# EAGLE board Testing Station Draft V1 (EAGLE 9.4.2)
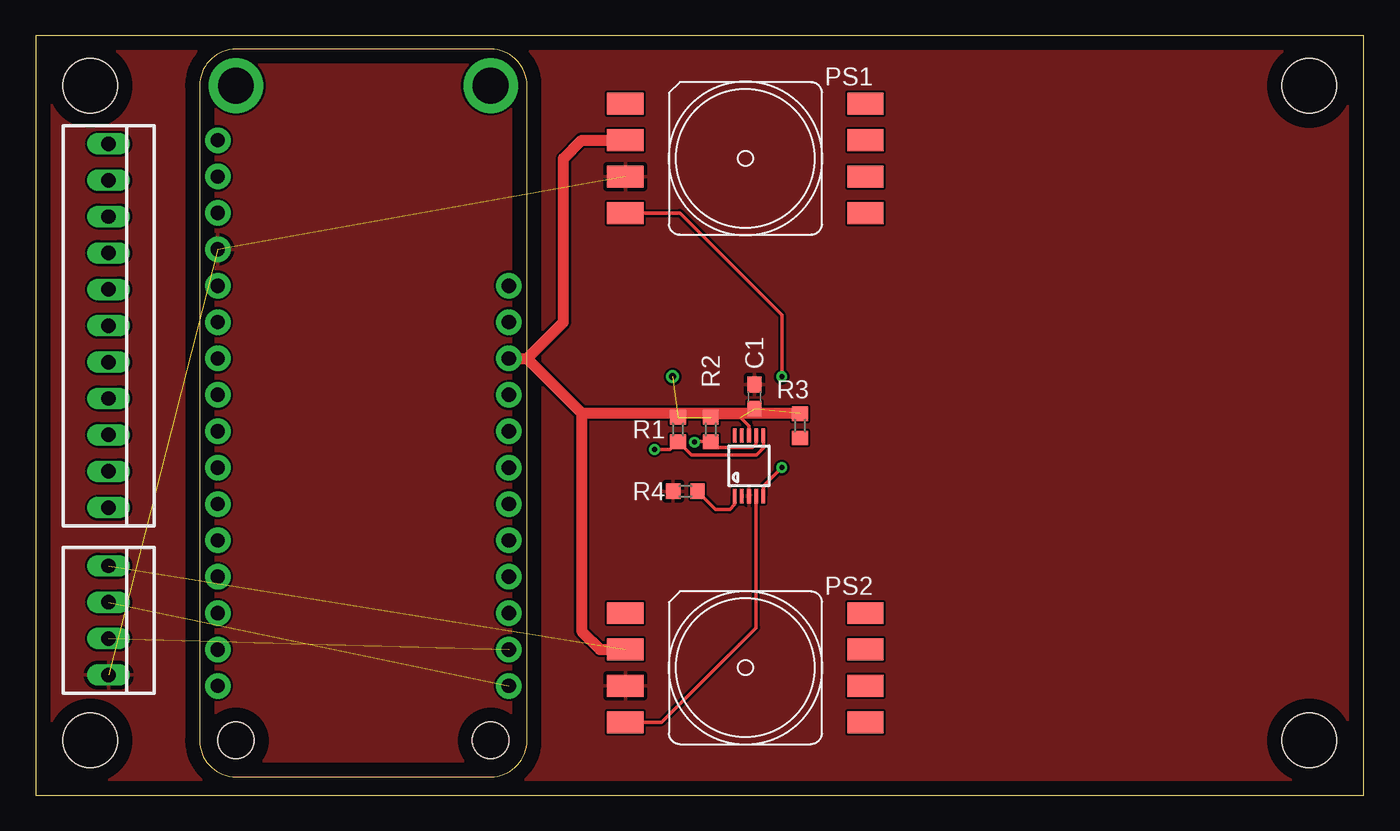
[diagram p0: board, top side]
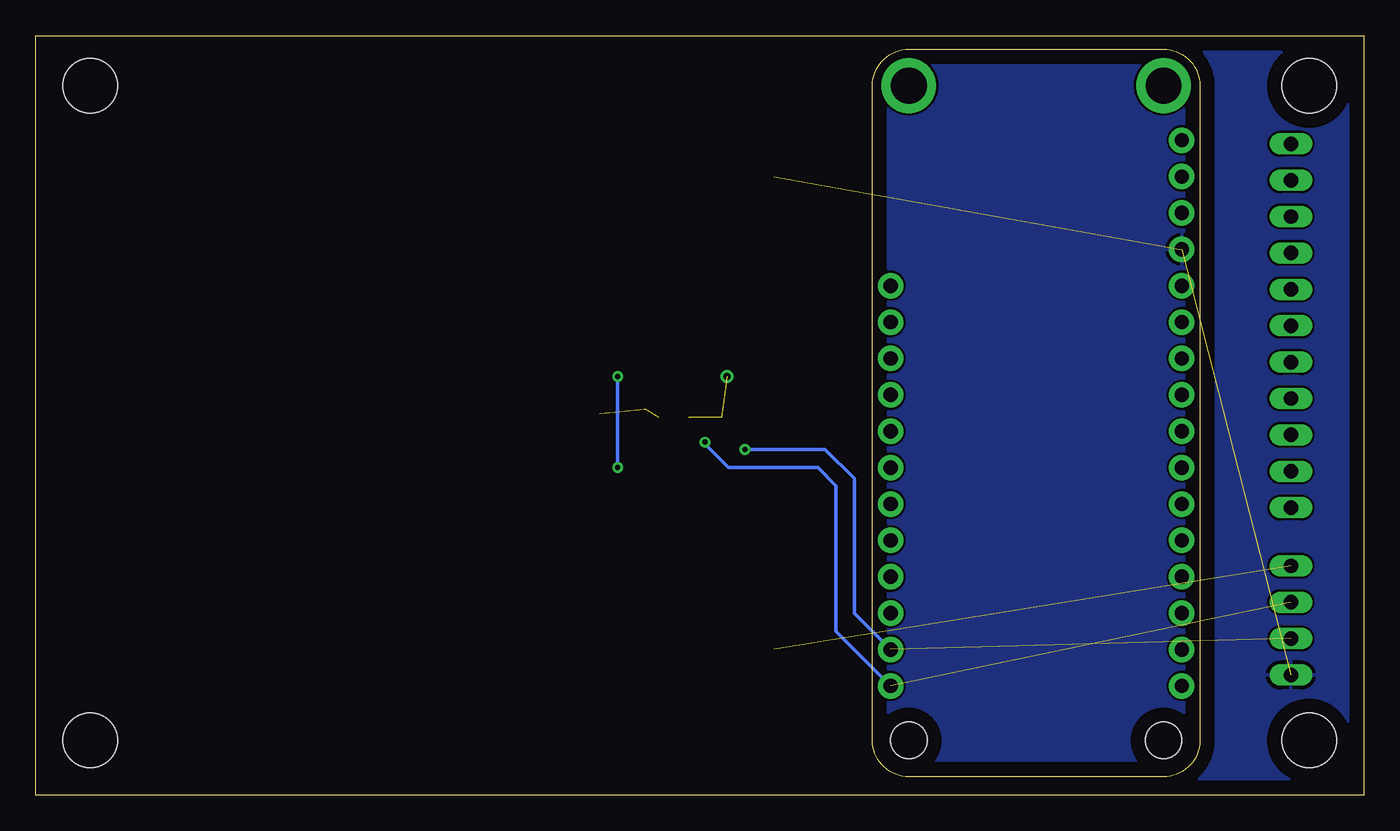
[diagram p1: board, bottom side, seen from below]

Size 92.69 x 53.01 mm. Coordinates in mm from the lower left corner, seen from the top.
Outline: 0,0 92.69,0 92.69,53.01 0,53.01 0,0
Copper layers (1*16): Top 0.035mm / dielectric 1.5mm / Bottom 0.035mm
Design rules "default": minimum track width 6mil, minimum drill 0.35mm, track to track 6mil, track to pad 6mil, pad to pad 6mil, via to via 6mil, smd to smd 6mil, copper to edge 40mil, drill to drill 6mil, minimum pad ring 10mil, minimum via ring 8mil, stop-mask expansion 4mil, vias tented up to drill 0mil, thermal gap 10mil
Holes 3.81 mm at 3.81,49.53 3.81,3.81 88.9,3.81 88.9,49.53

## Footprints (pad centres in the part's own frame; a part is rotated, then mirrored left to right if it is on the bottom)
C0603 = smd 1.1 x 1: 1 -0.85,0; 2 0.85,0
FEATHERWING = drill 1 pad 1.778: 1 6.35,1.27; 2 8.89,1.27; 3 11.43,1.27; 4 13.97,1.27; 5 16.51,1.27; 6 19.05,1.27; 7 21.59,1.27; 8 24.13,1.27; 9 26.67,1.27; 10 29.21,1.27; 11 31.75,1.27; 12 34.29,1.27; 13 36.83,1.27; 14 39.37,1.27; 15 41.91,1.27; 16 44.45,1.27; 17 44.45,21.59; 18 41.91,21.59; 19 39.37,21.59; 20 36.83,21.59; 21 34.29,21.59; 22 31.75,21.59; 23 29.21,21.59; 24 26.67,21.59; 25 24.13,21.59; 26 21.59,21.59; 27 19.05,21.59; 28 16.51,21.59 | drill 2.5 pad 3.81: P$1 2.54,20.32; P$2 2.54,2.54 | hole 2.54: 48.26,20.32; 48.26,2.54
482 = smd 2.54 x 1.524: 1 8.382,-3.81; 2 8.382,-1.27; 3 8.382,1.27; 4 8.382,3.81; 5 -8.382,3.81; 6 -8.382,1.27; 7 -8.382,-1.27; 8 -8.382,-3.81
R0603 = smd 1 x 1.1: 1 -0.85,0; 2 0.85,0
MICROBUILDER_MSOP10 = smd 0.25 x 1: 1 -1,-2.113; 2 -0.5,-2.113; 3 0,-2.113; 4 0.5,-2.113; 5 1,-2.113; 6 1,2.113; 7 0.5,2.113; 8 0,2.113; 9 -0.5,2.113; 10 -1,2.113
22-23-2041 = drill 1 long: 1 -3.81,0; 2 -1.27,0; 3 1.27,0; 4 3.81,0
22-23-2111 = drill 1 long: 1 -12.7,0; 2 -10.16,0; 3 -7.62,0; 4 -5.08,0; 5 -2.54,0; 6 0,0; 7 2.54,0; 8 5.08,0; 9 7.62,0; 10 10.16,0; 11 12.7,0

## Placement (x,y rotation side)
C1  [C0603]  50.16,27.81 90 top
MS1  FEATHERWING  [FEATHERWING]  11.43,52.07 270 top
PS1  [482]  49.53,44.45 180 top
PS2  [482]  49.53,8.89 180 top
R1  [R0603]  44.83,25.53 90 top
R2  [R0603]  47.12,25.53 90 top
R3  [R0603]  53.34,25.78 90 top
R4  [R0603]  45.34,21.21 0 top
U$1  ADS1015  [MICROBUILDER_MSOP10]  49.78,22.99 0 top
X1  22-23-2041  [22-23-2041]  5.08,12.19 270 top
X2  22-23-2111  [22-23-2111]  5.08,32.77 270 top

## Library data of the parts
C1 = rcl; SPICEPREFIX: C
MS1 = adafruit
PS1 PS2 = mpx-freescale
R1-R4 = rcl; SPICEPREFIX: R
U$1 = Adafruit_ADS1015_12Bit_I2C_ADC
X1 = con-molex; MF: MOLEX; MPN: 22-23-2041; OC_FARNELL: 1462920; OC_NEWARK: 38C0355
X2 = con-molex; MF: MOLEX; MPN: 22-23-2111; OC_FARNELL: 5388879; OC_NEWARK: 27C9916

## Nets
+5V: PS2.2 X1.1
A0: PS2.4 U$1.4
A1: PS1.4 U$1.5
ADDR: R4.2 U$1.1
GND: C1.2 MS1.4 PS1.3 PS2.3 R4.1 U$1.3 X1.4
R3: R3.1
S$2: C1.1 R1.2 R2.2 R3.2 U$1.8
S$5: MS1.26
SCL: MS1.18 R1.1 U$1.6 X1.3
SDA: R2.1 U$1.7 X1.2

## Tracks (layer width: path | path; a pad name or v marks a point on that pad's centre or on a via)
+5V  (1 unrouted)
A0
  Top 0.254: PS2.4 43.69,5.08 50.28,11.68 U$1.4
A1  (via drill 0.35)
  Top 0.254: PS1.4 44.96,40.64 52.07,33.53 v52.07,29.21 | U$1.5 50.78,21.57 v52.07,22.86
  Bottom 0.254: v52.07,29.21 v52.07,22.86
ADDR
  Top 0.254: R4.2 47.46,19.94 48.45,19.94 48.78,20.27 U$1.1
GND  (2 unrouted)
  pour Top: -2.03,54.61 -2.03,-2.54 95.25,-2.54 95.25,54.61
  pour Bottom: 97.79,57.15 -3.81,57.15 -3.81,-5.08 97.79,-5.08
S$2  (via drill 0.5)  (4 unrouted)
  Top 0.254: U$1.8 49.78,25.78 49.19,26.38 R2.2
  Top 0.762: R3.2 53.38,26.67
  other vias: 44.45,29.21
S$5
  Top 0.762: MS1.26 34.29,30.48 | 34.29,30.48 36.83,33.02 36.83,44.45 38.1,45.72 40.64,45.72 | 38.1,26.67 34.29,30.48 | 38.1,26.67 38.1,11.43 39.37,10.16 40.64,10.16 | 38.1,26.67 53.34,26.67
SCL  (via drill 0.35)  (1 unrouted)
  Top 0.203: X1.3 5.08,10.56
  Top 0.254: U$1.6 50.78,24.24 50.29,23.75 45.76,23.75 R1.1 44.28,24.13 v43.18,24.13
  Bottom 0.254: v43.18,24.13 37.59,24.13 35.56,22.1 35.56,12.7 MS1.18
SDA  (via drill 0.35)  (1 unrouted)
  Top 0.254: U$1.7 50.28,24.5 50.04,24.26 47.54,24.26 R2.1 46.01,24.68 v45.97,24.64
  Bottom 0.254: v45.97,24.64 45.97,24.51 44.32,22.86 38.1,22.86 36.83,21.59 36.83,11.43 33.02,7.62